# Altium PCB quantum-switch-control-panel.PcbDoc
Units mil, origin at the board's own origin, x right, y up, seen from the top; angles counter-clockwise.
Board outline 12000 x 3500 mil, 2 copper layers (Top Layer, Bottom Layer); 43 components, 30 nets, 123 pads, 3 vias.
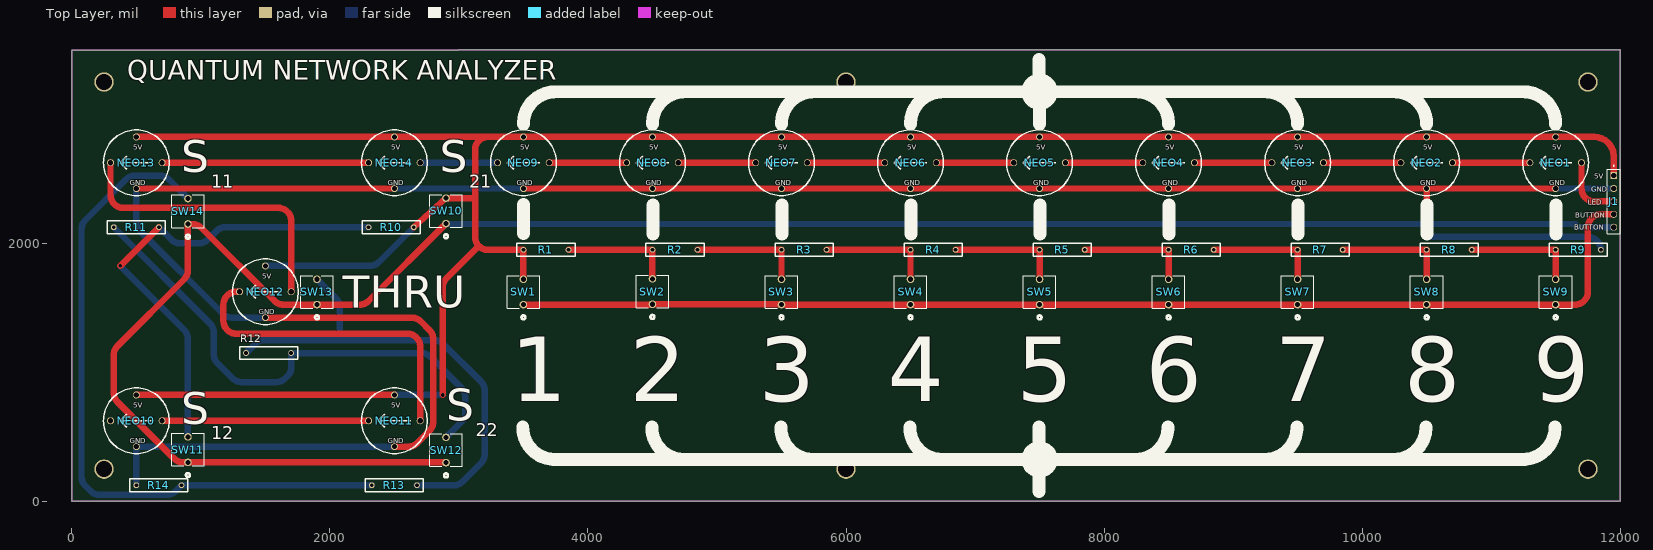
[diagram p0: Top Layer view]
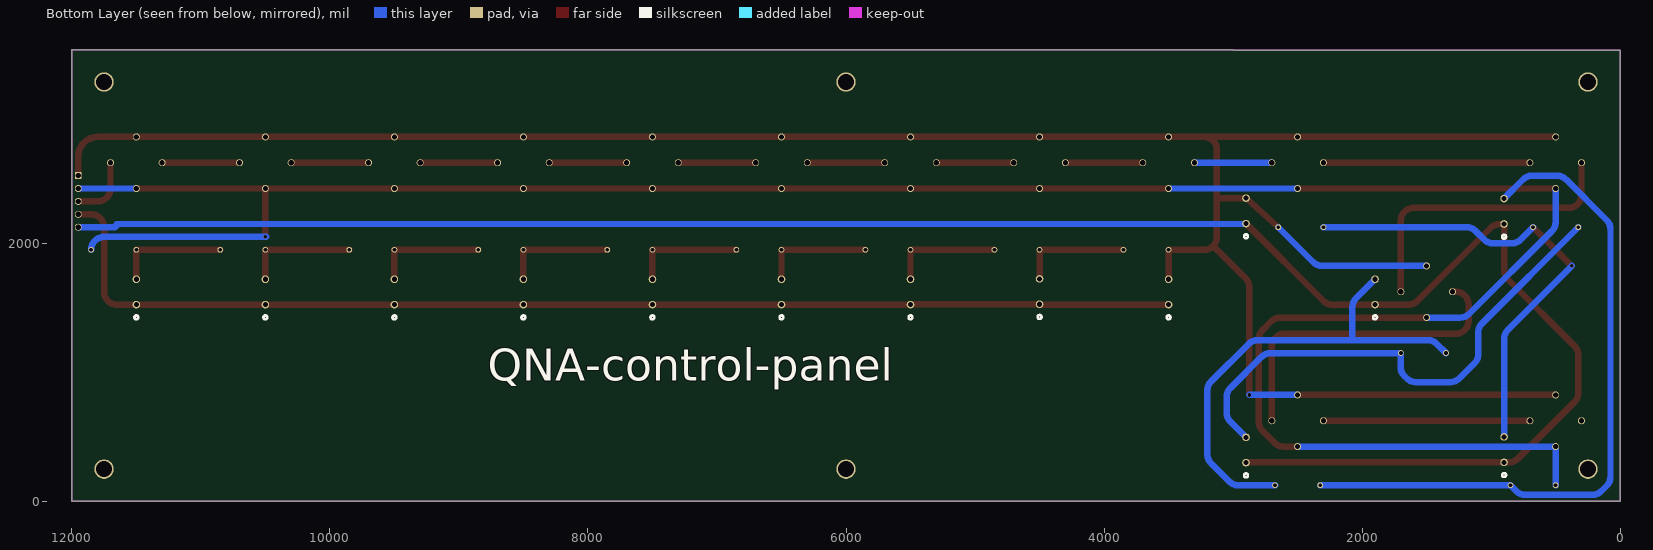
[diagram p1: Bottom Layer view, seen from below]
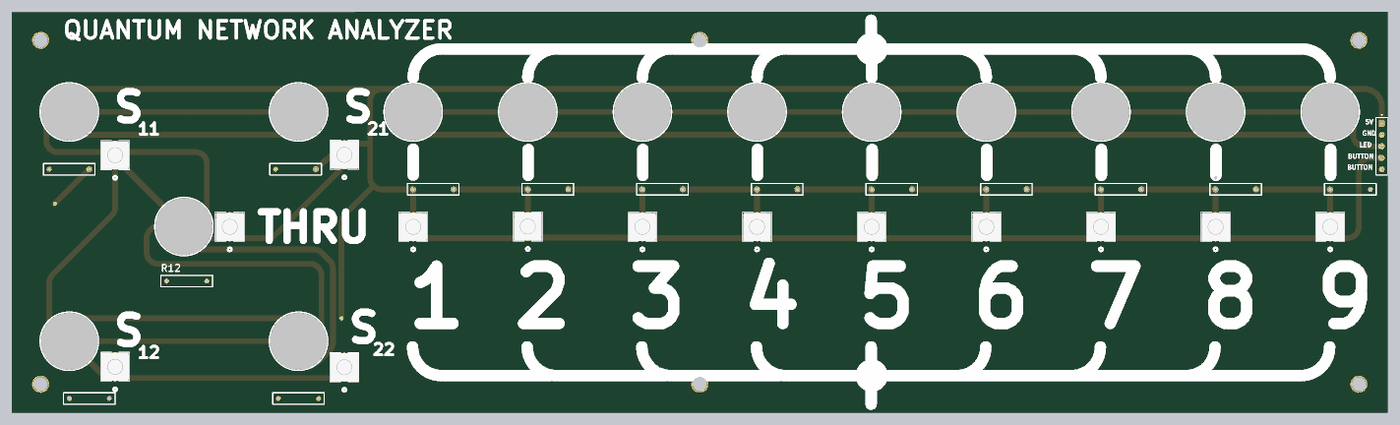
[diagram p2: 3D render of the assembled board from above, using the file's embedded part models]

## Layer stack, top to bottom
Top Solder: solder mask 0.4, Solder Resist, Dk 3.5
Top Layer: signal copper 1.4
Dielectric 1: dielectric 12.6, FR-4, Dk 4.8
Bottom Layer: signal copper 1.4
Bottom Solder: solder mask 0.4, Solder Resist, Dk 3.5

## Board outline
0,0 0,3495 3000,3495 3000,3500 12000,3500 12000,0

## Design rules (kind name [scope] priority, off if disabled: settings)
Clearance [All] p1: gap=10 ignorepadtopadclearanceinfootprint=FALSE except(0: Arc-Hole Track-Hole SMDPad-Hole THPad-Hole Via-Hole Fill-Hole Poly-Hole Region-Hole Text-Hole)
PolygonConnect [All] p1: connectstyle=Relief reliefconductorwidth=10 reliefentries=4 polygonreliefangle="90 Angle" airgapwidth=10
RoutingVias [All] p1: holewidth=28 width=50 viastyle="Through Hole" minholewidth=28 minwidth=50 maxholewidth=28 maxwidth=50
SolderMaskExpansion [All] p1: expansion=4 istentingtop=FALSE
Width [All] p1: maxlimit=150 minlimit=10 preferedwidth=50 toplayer_maxwidth=100 minimp=50.000000 maximp=50.000000 favimp=50.000000
30 further rules are at their usual default settings.

## Components (designator, comment, footprint, x,y, rotation, side; value= is the part's Value field where it differs from the comment)
J1 "TSW-105-07-G-S" SAMTEC_TSW-105-07-G-S 11950,2325 r270 top
NEO1 "adafruit-1559-neopixel-flora" adafruit-1559-neopixel-flora 11500,2625 r0 top
NEO2 "adafruit-1559-neopixel-flora" adafruit-1559-neopixel-flora 10500,2625 r0 top
NEO3 "adafruit-1559-neopixel-flora" adafruit-1559-neopixel-flora 9500,2625 r0 top
NEO4 "adafruit-1559-neopixel-flora" adafruit-1559-neopixel-flora 8500,2625 r0 top
NEO5 "adafruit-1559-neopixel-flora" adafruit-1559-neopixel-flora 7500,2625 r0 top
NEO6 "adafruit-1559-neopixel-flora" adafruit-1559-neopixel-flora 6500,2625 r0 top
NEO7 "adafruit-1559-neopixel-flora" adafruit-1559-neopixel-flora 5500,2625 r0 top
NEO8 "adafruit-1559-neopixel-flora" adafruit-1559-neopixel-flora 4500,2625 r0 top
NEO9 "adafruit-1559-neopixel-flora" adafruit-1559-neopixel-flora 3500,2625 r0 top
NEO10 "adafruit-1559-neopixel-flora" adafruit-1559-neopixel-flora 500,625 r0 top
NEO11 "adafruit-1559-neopixel-flora" adafruit-1559-neopixel-flora 2500,625 r0 top
NEO12 "adafruit-1559-neopixel-flora" adafruit-1559-neopixel-flora 1500,1625 r0 top
NEO13 "adafruit-1559-neopixel-flora" adafruit-1559-neopixel-flora 500,2625 r0 top
NEO14 "adafruit-1559-neopixel-flora" adafruit-1559-neopixel-flora 2500,2625 r0 top
R1 "Resistor" "thruhole resistor" 3675,1950 r180 top
R2 "Resistor" "thruhole resistor" 4675,1950 r180 top
R3 "Resistor" "thruhole resistor" 5675,1950 r180 top
R4 "Resistor" "thruhole resistor" 6675,1950 r180 top
R5 "Resistor" "thruhole resistor" 7675,1950 r180 top
R6 "Resistor" "thruhole resistor" 8675,1950 r180 top
R7 "Resistor" "thruhole resistor" 9675,1950 r180 top
R8 "Resistor" "thruhole resistor" 10675,1950 r180 top
R9 "Resistor" "thruhole resistor" 11675,1950 r180 top
R10 "Resistor" "thruhole resistor" 2475,2125 r0 top
R11 "Resistor" "thruhole resistor" 500,2125 r0 top
R12 "Resistor" "thruhole resistor" 1525,1150 r0 top
R13 "Resistor" "thruhole resistor" 2500,125 r0 top
R14 "Resistor" "thruhole resistor" 675,125 r0 top
SW1 "TL59AF100Q" SW_TL59AF100Q_EWI 3500,1525 r90 top
SW2 "TL59AF100Q" SW_TL59AF100Q_EWI 4500,1528.15 r90 top
SW3 "TL59AF100Q" SW_TL59AF100Q_EWI 5500,1525 r90 top
SW4 "TL59AF100Q" SW_TL59AF100Q_EWI 6500,1525 r90 top
SW5 "TL59AF100Q" SW_TL59AF100Q_EWI 7500,1525 r90 top
SW6 "TL59AF100Q" SW_TL59AF100Q_EWI 8500,1525 r90 top
SW7 "TL59AF100Q" SW_TL59AF100Q_EWI 9500,1525 r90 top
SW8 "TL59AF100Q" SW_TL59AF100Q_EWI 10500,1525 r90 top
SW9 "TL59AF100Q" SW_TL59AF100Q_EWI 11500,1525 r90 top
SW10 "TL59AF100Q" SW_TL59AF100Q_EWI 2900,2153.15 r90 top
SW11 "TL59AF100Q" SW_TL59AF100Q_EWI 900,303.15 r90 top
SW12 "TL59AF100Q" SW_TL59AF100Q_EWI 2900,300 r90 top
SW13 "TL59AF100Q" SW_TL59AF100Q_EWI 1900,1525 r90 top
SW14 "TL59AF100Q" SW_TL59AF100Q_EWI 900,2150 r90 top

## Footprints (in the part's own frame and the unit in brackets; to place one, negate y for a bottom-side part, rotate by r counter-clockwise, add the part's x,y. Pads: shape width x height; smd on the part's side, far side on the other; paste and mask are expansions set on the pad)
adafruit-1559-neopixel-flora [mm]
  round 1.37 hole 1.02: 5V(0,5.08) GND(0,-5.08) IN(5.08,0) OUT(-5.08,0)
  silkscreen extent -6.48,-6.48 6.48,6.48, body extent -6.35,-6.35 6.35,6.35, height 2.4
SAMTEC_TSW-105-07-G-S [mm]
  rect 1.37x1.37 hole 1.02: 01(-5.08,0)
  round 1.37 hole 1.02: 02(-2.54,0) 03(0,0) 04(2.54,0) 05(5.08,0)
  silkscreen extent -7.1,-1.27 6.35,1.27, body extent -6.48,-1.27 6.35,1.27, height 1.44
SW_TL59AF100Q_EWI [mil]
  round 59 / inner round 60 / far side round 59 hole 39 paste-99999 mask+0: 1(0,0) 2(196.85,0)
  silkscreen extent -114,-127 225,127, body extent -24,-122 220,122, height 202
"thruhole resistor" [mil] "thruhole resistor"
  round 45 hole 30: 1(-175,0) 2(175,0)
  silkscreen extent -225,-50 225,50

## Part data
J1: Package=None, Availability=Unavailable, MF="Samtec Inc.", MP=TSW-105-07-G-S, Price=None
SW1 SW2 SW3 SW4 SW5 SW6 SW7 SW8 SW9 SW10 SW11 SW12 SW13 SW14: "No Description Available", Mfr_Name=E-Switch, Copyright="Copyright (C) 2024 Ultra Librarian. All rights reserved.", Manufacturer_Part_Number=TL59AF100Q, RefDes=RefDes, Type=DEV

## Free pads (board coordinates)
  round 150 hole 123 unplated: 8(250,250) 8(250,3250) 8(6000,250) 8(6000,3250) 8(11750,250) 8(11750,3250)

## Via types
v1: diameter 28, hole 28, Top Layer to Bottom Layer, 3 vias

## Nets (pads, with @x,y where several pads share a name; then routed paths per layer and width w, separated by ;. In a path a pad name is that pad's centre, name@x,y a point inside that pad or via, vN(x,y) a via of type N, cw(c..) or ccw(c..) an arc to the next point about the centre after c; other vN are vias at no path point)
GND: J1.02 NEO1.GND NEO2.GND NEO3.GND NEO4.GND NEO5.GND NEO6.GND NEO7.GND NEO8.GND NEO9.GND NEO10.GND NEO11.GND NEO12.GND NEO13.GND NEO14.GND R9.1 R14.1 | length 19540.5
  Top Layer w50: NEO13.GND NEO14.GND ; NEO12.GND 2633.58,1425 cw(c2633.58,1325) 2704.29,1395.71 2770.71,1329.29 cw(c2700,1258.58) 2800,1258.58 2800,616.42 cw(c2700,616.42) 2770.71,545.71 2679.29,454.29 cw(c2608.58,525) 2608.58,425 NEO11.GND ; NEO9.GND NEO8.GND NEO7.GND NEO6.GND NEO5.GND NEO4.GND NEO3.GND NEO2.GND ; v1(10500,2050) NEO2.GND ; NEO1.GND NEO2.GND
  Bottom Layer w50: R14.1 NEO10.GND NEO11.GND ; NEO13.GND 500,2166.42 ccw(c600,2166.42) 529.29,2095.71 1170.71,1454.29 ccw(c1241.42,1525) 1241.42,1425 NEO12.GND ; NEO14.GND NEO9.GND ; v1@10494.69,2050 v1(10500,2050) 11750,2050 cw(c11750,1950) R9.1 ; NEO1.GND J1.02
NetJ1_01: J1.01 NEO1.5V NEO2.5V NEO3.5V NEO4.5V NEO5.5V NEO6.5V NEO7.5V NEO8.5V NEO9.5V NEO10.5V NEO11.5V NEO12.5V NEO13.5V NEO14.5V R1.2 R10.2 SW1.2 SW10.2 | length 18649.2
  Top Layer w50: NEO10.5V NEO11.5V ; NEO13.5V NEO14.5V 3225,2825 ; R10.2 SW10.2 3125,2350 ; v1(2875,825) 2875,1658.58 cw(c2975,1658.58) 2904.29,1729.29 3154.29,1979.29 ; SW1.2 R1.2 3225,1950 cw(c3225,2050) 3154.29,1979.29 ; J1.01 11950,2673.48 ccw(c11798.48,2673.48) 11798.48,2825 NEO1.5V NEO2.5V NEO3.5V NEO4.5V NEO5.5V NEO6.5V NEO7.5V NEO8.5V NEO9.5V 3225,2825 ; 3125,2350 3125,2725 cw(c3225,2725) 3225,2825 ; 3125,2350 3125,2050 ccw(c3225,2050) 3154.29,1979.29
  Bottom Layer w50: NEO12.5V 2308.58,1825 ccw(c2308.58,1925) 2379.29,1854.29 R10.2 ; NEO11.5V v1(2875,825)
NetJ1_03: J1.03 NEO1.IN | length 507.1
  Top Layer w50: NEO1.IN 11700,2425 ccw(c11800,2425) 11800,2325 J1.03
NetJ1_04: J1.04 SW1.1 SW2.1 SW3.1 SW4.1 SW5.1 SW6.1 SW7.1 SW8.1 SW9.1 | length 9065.8
  Top Layer w50: SW1.1 4492.4,1525 ccw(c4492.4,1535.75) SW2.1 5492.4,1528.15 cw(c5492.4,1517.4) SW3.1 SW4.1 SW5.1 SW6.1 SW7.1 SW8.1 SW9.1 11650,1525 ccw(c11650,1625) 11750,1625 11750,2125 cw(c11850,2125) 11850,2225 J1.04
NetJ1_05: J1.05 SW10.1 SW11.1 SW12.1 SW13.1 SW14.1 | length 15923.9
  Top Layer w50: SW12.1 ccw(c2892.4,292.4) 2892.4,303.15 SW11.1 863.27,303.15 cw(c863.27,403.15) 792.56,332.44 354.29,770.71 cw(c425,841.42) 325,841.42 325,1133.58 cw(c425,1133.58) 354.29,1204.29 870.71,1720.71 ccw(c800,1791.42) 900,1791.42 SW14.1 933.58,2150 cw(c933.58,2050) 1004.29,2120.71 1570.71,1554.29 ccw(c1641.42,1625) 1641.42,1525 SW13.1 2230.43,1525 ccw(c2230.43,1625) 2301.14,1554.29 SW10.1
  Bottom Layer w50: SW10.1 ccw(c2907.6,2160.75) 2907.6,2150 11650,2150 ccw(c11675,2150) 11675,2125 J1.05
NetNEO1_OUT: NEO1.OUT NEO2.IN | length 600
  Top Layer w50: NEO2.IN NEO1.OUT
NetNEO2_OUT: NEO2.OUT NEO3.IN | length 600
  Top Layer w50: NEO3.IN NEO2.OUT
NetNEO3_OUT: NEO3.OUT NEO4.IN | length 600
  Top Layer w50: NEO4.IN NEO3.OUT
NetNEO4_OUT: NEO4.OUT NEO5.IN | length 600
  Top Layer w50: NEO5.IN NEO4.OUT
NetNEO5_OUT: NEO5.OUT NEO6.IN | length 600
  Top Layer w50: NEO6.IN NEO5.OUT
NetNEO6_OUT: NEO6.OUT NEO7.IN | length 600
  Top Layer w50: NEO7.IN NEO6.OUT
NetNEO7_OUT: NEO7.OUT NEO8.IN | length 600
  Top Layer w50: NEO8.IN NEO7.OUT
NetNEO8_OUT: NEO8.OUT NEO9.IN | length 600
  Top Layer w50: NEO9.IN NEO8.OUT
NetNEO9_OUT: NEO9.OUT NEO14.IN | length 600
  Bottom Layer w50: NEO14.IN NEO9.OUT
NetNEO10_IN: NEO10.IN NEO11.OUT | length 1600
  Top Layer w50: NEO10.IN NEO11.OUT
NetNEO11_IN: NEO11.IN NEO12.OUT | length 2521.2
  Top Layer w50: NEO12.OUT 1275,1625 ccw(c1275,1525) 1175,1525 1175,1400 ccw(c1275,1400) 1275,1300 2600,1300 cw(c2600,1200) 2700,1200 NEO11.IN
NetNEO12_IN: NEO12.IN NEO13.OUT | length 2314.2
  Top Layer w50: NEO13.OUT 300,2375 ccw(c400,2375) 400,2275 1600,2275 cw(c1600,2175) 1700,2175 NEO12.IN
NetNEO13_IN: NEO13.IN NEO14.OUT | length 1600
  Top Layer w50: NEO13.IN NEO14.OUT
NetR1_1: R1.1 R2.2 SW2.2 | length 875
  Top Layer w50: R1.1 R2.2 SW2.2
NetR2_1: R2.1 R3.2 SW3.2 | length 878.1
  Top Layer w50: R2.1 R3.2 SW3.2
NetR3_1: R3.1 R4.2 SW4.2 | length 878.1
  Top Layer w50: R3.1 R4.2 SW4.2
NetR4_1: R4.1 R5.2 SW5.2 | length 878.1
  Top Layer w50: R4.1 R5.2 SW5.2
NetR5_1: R5.1 R6.2 SW6.2 | length 878.1
  Top Layer w50: R5.1 R6.2 SW6.2
NetR6_1: R6.1 R7.2 SW7.2 | length 878.1
  Top Layer w50: R6.1 R7.2 SW7.2
NetR7_1: R7.1 R8.2 SW8.2 | length 878.1
  Top Layer w50: R7.1 R8.2 SW8.2
NetR8_1: R8.1 R9.2 SW9.2 | length 878.1
  Top Layer w50: R8.1 R9.2 SW9.2
NetR10_1: R10.1 R11.2 SW11.2 | length 3678.1
  Top Layer w50: v1(375,1825) R11.2
  Bottom Layer w50: v1(375,1825) 870.71,1329.29 cw(c800,1258.58) 900,1258.58 SW11.2 ; R11.2 770.71,2029.29 ccw(c841.42,2100) 841.42,2000 983.58,2000 ccw(c983.58,2100) 1054.29,2029.29 1120.71,2095.71 cw(c1191.42,2025) 1191.42,2125 R10.1
NetR11_1: R11.1 R12.2 SW12.2 | length 4055.3
  Bottom Layer w50: R11.1 1070.71,1379.29 cw(c1000,1308.58) 1100,1308.58 1100,1141.42 ccw(c1200,1141.42) 1129.29,1070.71 1245.71,954.29 ccw(c1316.42,1025) 1316.42,925 1583.58,925 ccw(c1583.58,1025) 1654.29,954.29 1675,975 ccw(c1614.64,1035.36) 1700,1035.36 R12.2 2708.58,1150 cw(c2708.58,1050) 2779.29,1120.71 3020.71,879.29 cw(c2950,808.58) 3050,808.58 3050,688.27 cw(c2950,688.27) 3020.71,617.56 SW12.2
NetR12_1: R12.1 R13.2 SW13.2 | length 3737.8
  Bottom Layer w50: R12.1 1420.71,1220.71 cw(c1491.42,1150) 1491.42,1250 2075,1250 ; SW13.2 2045.71,1576.14 cw(c1975,1505.43) 2075,1505.43 2075,1250 ; R13.2 2958.58,125 ccw(c2958.58,225) 3029.29,154.29 3170.71,295.71 ccw(c3100,366.42) 3200,366.42 3200,858.58 ccw(c3100,858.58) 3170.71,929.29 2879.29,1220.71 ccw(c2808.58,1150) 2808.58,1250 2075,1250
NetR13_1: R13.1 R14.2 SW14.2 | length 5350.8
  Bottom Layer w50: SW14.2 751.14,2495.71 ccw(c680.43,2425) 680.43,2525 491.42,2525 ccw(c491.42,2425) 420.71,2495.71 104.29,2179.29 ccw(c175,2108.58) 75,2108.58 75,191.42 ccw(c175,191.42) 104.29,120.71 145.71,79.29 ccw(c216.42,150) 216.42,50 733.58,50 ccw(c733.58,150) 804.29,79.29 R14.2 R13.1
pads on no net: NEO10.OUT

## Keep-outs
Keep-Out Layer:
  lines w10: 3000,3495 0,3495 0,0 3000,0 12000,0 ; 3000,3500 12000,3500 12000,2580 12000,930 12000,5

## Silkscreen, mask and mechanical layers (free items; w line width, h text height)
Top Overlay:
  circle w100: c7500,325 r90.14
  circle w100: c7500,3175 r90.14
  lines w10: 425,575 375,625 ; 425,675 375,625 ; 425,2575 375,2625 ; 425,2675 375,2625 ; 625,625 375,625 ; 625,2625 375,2625 ; 1425,1575 1375,1625 ; 1425,1675 1375,1625 ; 1625,1625 1375,1625 ; 2425,575 2375,625 ; 2425,675 2375,625 ; 2425,2575 2375,2625 ; 2425,2675 2375,2625 ; 2625,625 2375,625 ; 2625,2625 2375,2625 ; 3425,2575 3375,2625 ; 3425,2675 3375,2625 ; 3625,2625 3375,2625 ; 4425,2575 4375,2625 ; 4425,2675 4375,2625 ; 4625,2625 4375,2625 ; 5425,2575 5375,2625 ; 5425,2675 5375,2625 ; 5625,2625 5375,2625 ; 6425,2575 6375,2625 ; 6425,2675 6375,2625 ; 6625,2625 6375,2625 ; 7425,2575 7375,2625 ; 7425,2675 7375,2625 ; 7625,2625 7375,2625 ; 8425,2575 8375,2625 ; 8425,2675 8375,2625 ; 8625,2625 8375,2625 ; 9425,2575 9375,2625 ; 9425,2675 9375,2625 ; 9625,2625 9375,2625 ; 10425,2575 10375,2625 ; 10425,2675 10375,2625 ; 10625,2625 10375,2625 ; 11425,2575 11375,2625 ; 11425,2675 11375,2625 ; 11625,2625 11375,2625
  lines w100: 3494.94,575.35 ccw(c3744.94,575.35) 3744.94,325.35 11244.94,325.35 ccw(c11244.94,575.35) 11494.94,575.35 ; 3500,2075 3500,2300 ; 3500,2925 cw(c3750,2925) 3750,3175 11250,3175 cw(c11250,2925) 11500,2925 ; 4494.94,575.35 ccw(c4744.94,575.35) 4744.94,325.35 ; 4500,2925 cw(c4750,2925) 4750,3175 ; 4503.53,2072.4 4503.53,2297.4 ; 5494.94,575.35 ccw(c5744.94,575.35) 5744.94,325.35 ; 5500,2925 cw(c5750,2925) 5750,3175 ; 5503.53,2072.4 5503.53,2297.4 ; 6494.94,575.35 ccw(c6744.94,575.35) 6744.94,325.35 ; 6500,2925 cw(c6750,2925) 6750,3175 7500,3175 7500,2925 ; 6503.53,2072.4 6503.53,2297.4 ; 7494.94,75.35 7494.94,325.35 ; 7494.94,575.35 7494.94,325.35 ; 7494.94,3175.35 7494.94,3425.35 ; 7503.53,2072.4 7503.53,2297.4 ; 8250,3175 cw(c8250,2925) 8500,2925 ; 8494.94,575.35 cw(c8244.94,575.35) 8244.94,325.35 7494.94,325.35 ; 8503.53,2072.4 8503.53,2297.4 ; 9244.94,325.35 ccw(c9244.94,575.35) 9494.94,575.35 ; 9250,3175 cw(c9250,2925) 9500,2925 ; 9503.53,2072.4 9503.53,2297.4 ; 10244.94,325.35 ccw(c10244.94,575.35) 10494.94,575.35 ; 10250,3175 cw(c10250,2925) 10500,2925 ; 10503.53,2072.4 10503.53,2297.4 ; 11503.53,2072.4 11503.53,2297.4
  text "QUANTUM NETWORK ANALYZER" at 430,3269.28 h150
  text "5V" at 475,2725 h39.37
  text "5V" at 2475,2725 h39.37
  text "5V" at 3475,2725 h39.37
  text "5V" at 4475,2725 h39.37
  text "5V" at 5475,2725 h39.37
  text "5V" at 6475,2725 h39.37
  text "5V" at 7475,2725 h39.37
  text "5V" at 8475,2725 h39.37
  text "5V" at 9475,2725 h39.37
  text "5V" at 10475,2725 h39.37
  text "5V" at 11475,2725 h39.37
  text "S" at 850,2550 h250
  text "S" at 2850,2550 h250
  text "5V" at 11800,2500 h39.37
  text "GND" at 450,2450 h39.37
  text "GND" at 2450,2450 h39.37
  text "GND" at 3450,2450 h39.37
  text "GND" at 4450,2450 h39.37
  text "GND" at 5450,2450 h39.37
  text "GND" at 6450,2450 h39.37
  text "GND" at 7450,2450 h39.37
  text "GND" at 8450,2450 h39.37
  text "GND" at 9450,2450 h39.37
  text "GND" at 10450,2450 h39.37
  text "GND" at 11450,2450 h39.37
  text "11" at 1080,2430 h100
  text "21" at 3080,2430 h100
  text "GND" at 11775,2400 h39.37
  text "LED" at 11750,2300 h39.37
  text "BUTTON" at 11650,2200 h39.37
  text "BUTTON" at 11642.93,2103.59 h39.37
  text "5V" at 1475,1725 h39.37
  text "THRU" at 2100,1500 h250
  text "GND" at 1450,1450 h39.37
  text "1" at 3400,775 h500
  text "2" at 4325,775 h500
  text "3" at 5325,775 h500
  text "4" at 6325,775 h500
  text "5" at 7325,775 h500
  text "6" at 8325,775 h500
  text "7" at 9325,775 h500
  text "8" at 10325,775 h500
  text "9" at 11325,775 h500
  text "5V" at 475,725 h39.37
  text "5V" at 2475,725 h39.37
  text "S" at 2900,625 h250
  text "S" at 850,600 h250
  text "22" at 3130,505 h100
  text "12" at 1080,480 h100
  text "GND" at 450,450 h39.37
  text "GND" at 2450,450 h39.37
Bottom Overlay:
  text "QNA-control-panel" at 8775,933.32 h250